# Altium PCB 3V3_LDO.PcbDoc
Units mm, origin at the board's own origin, x right, y up, seen from the top; angles counter-clockwise.
Board outline 20.6 x 11.6 mm, 2 copper layers (Top Layer, Bottom Layer); 11 components, 6 nets, 25 pads, 21 vias.
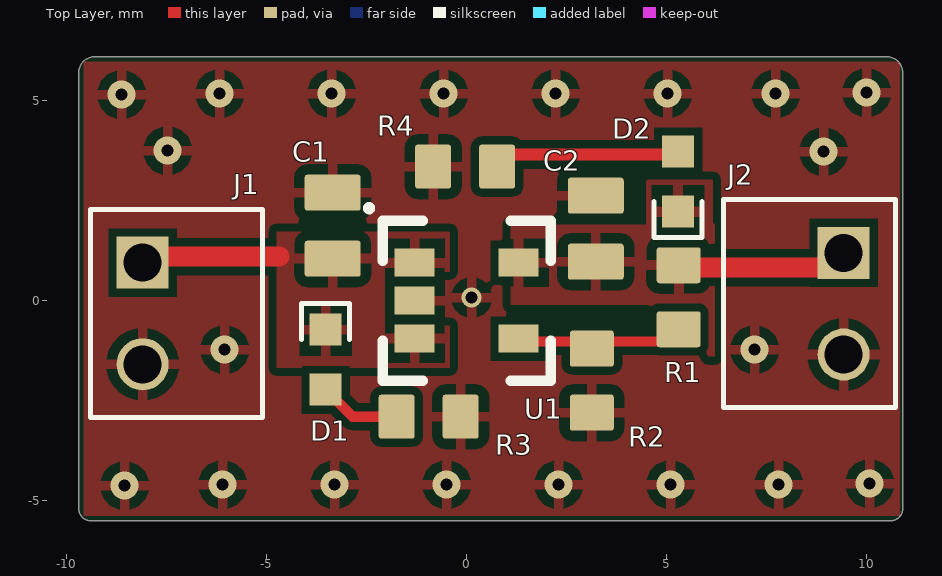
[diagram p0: Top Layer view]
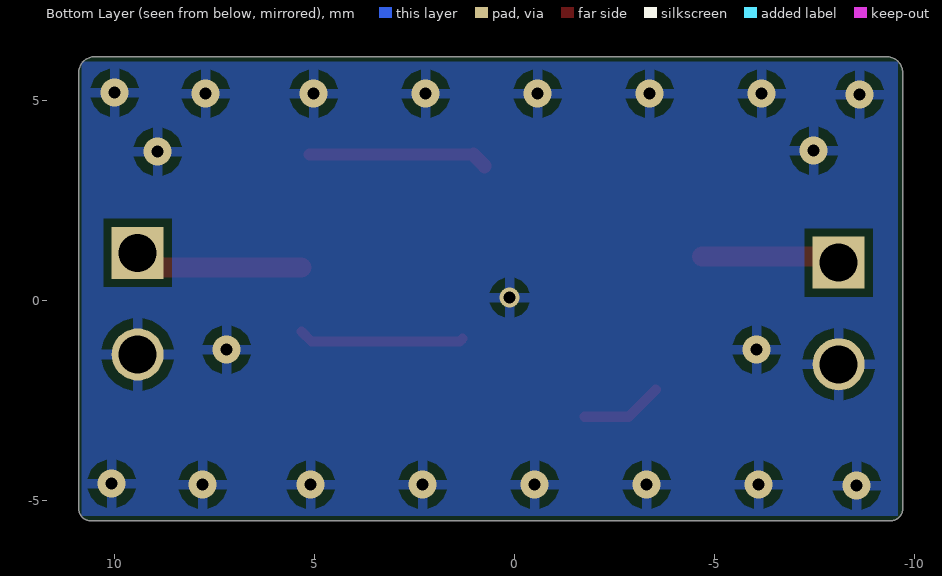
[diagram p1: Bottom Layer view, seen from below]
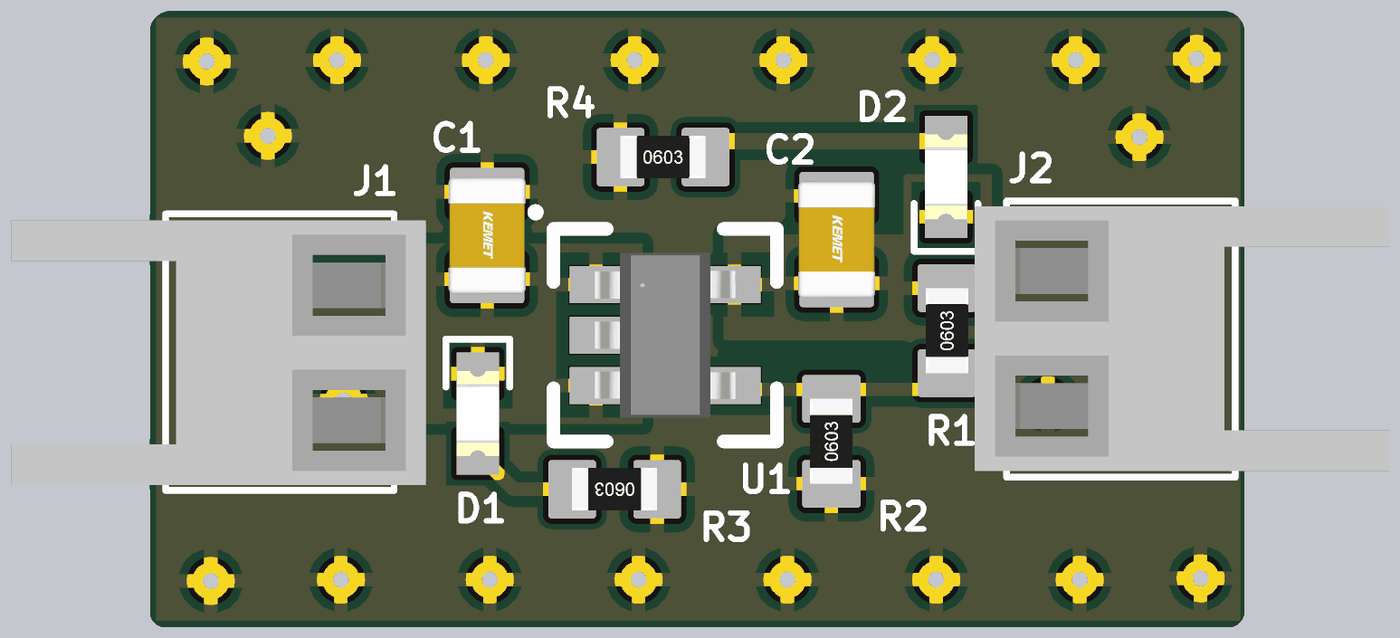
[diagram p2: 3D render of the assembled board from above, using the file's embedded part models]

## Layer stack, top to bottom
Top Solder: solder mask 0.0102, Solder Resist, Dk 3.5
Top Layer: signal copper 0.0356
Dielectric 1: dielectric 0.32, FR-4, Dk 4.8
Bottom Layer: signal copper 0.0356
Bottom Solder: solder mask 0.0102, Solder Resist, Dk 3.5

## Board outline
-9.4,-5.5 cw(c-9.4,-5.2) -9.7,-5.2 -9.7,5.7 cw(c-9.3,5.7) -9.3,6.1 10.5,6.1 cw(c10.5,5.7) 10.9,5.7 10.9,-5.2 cw(c10.6,-5.2) 10.6,-5.5

## Design rules (kind name [scope] priority, off if disabled: settings)
Clearance [All] p1: gap=0.2 ignorepadtopadclearanceinfootprint=FALSE
PolygonConnect [All] p1: connectstyle=Relief reliefconductorwidth=0.254 reliefentries=4 polygonreliefangle="90 Angle" airgapwidth=0.254
RoutingVias [All] p1: holewidth=0.711 width=1.27 viastyle="Through Hole" minholewidth=0.3 minwidth=0.5 maxholewidth=6.3 maxwidth=1.27
SolderMaskExpansion [All] p1: expansion=0.102 istentingtop=FALSE
UnRoutedNet [All] p1: checkbadconnections=TRUE
Width [All] p1: maxlimit=0.5 minlimit=0.2 preferedwidth=0.254 minimp=50.000000 maximp=50.000000 favimp=50.000000
29 further rules are at their usual default settings.

## Components (designator, comment, footprint, x,y, rotation, side; value= is the part's Value field where it differs from the comment)
C1 "GRM188R61A105KA61D" CAP0805 -3.35,1.875 r270 top value=1μF
C2 "GRM188R71A225KE15D" CAP0805 3.227,1.8 r270 top value=2.2μF
D1 "LTST-C190KRKT" LED0603 -3.525,-1.475 r270 top
D2 "LTST-C190GKT" LED0603 5.284,2.978 r90 top
J1 "0022022025" 0022022025#1 -8.3,-0.32 r270 top
J2 "0022022025" 0022022025#2 9.625,-0.075 r90 top
R1 "RC0603FR-079K1L" RES0603 5.301,0.085 r90 top value=9.1kΩ
R2 "RC0603FR-0715KL" RES0603 3.128,-1.998 r90 top value=15.0kΩ
R3 "RC0402JR-07300RL" RES0603 -0.95,-2.9 r180 top value=300Ω
R4 "RC0402FR-07130RL" RES0603 -0.04,3.352 r0 top value=130Ω
U1 "AP2210K-3.3TRE1" AP2210K-3.3TRE1 0,0 r270 top

## Footprints (in the part's own frame and the unit in brackets; to place one, negate y for a bottom-side part, rotate by r counter-clockwise, add the part's x,y. Pads: shape width x height; smd on the part's side, far side on the other; paste and mask are expansions set on the pad)
0022022025#1 [mm] "CONN RCPT 2POS 0.1 TIN PCB"
  rect 1.3x1.3 hole 0.95: 1(-1.27,0.2)
  round 1.3 hole 0.95: 2(1.27,0.2)
  silkscreen extent -2.6,-1.1 2.6,3.2, body extent -2.48,-4 2.5,3.8, height 7.88
0022022025#2 [mm] "CONN RCPT 2POS 0.1 TIN PCB"
  rect 1.3x1.3 hole 0.95: 1(1.27,0.2)
  round 1.3 hole 0.95: 2(-1.27,0.2)
  silkscreen extent -2.6,-1.1 2.6,3.2, body extent -2.48,-4 2.5,3.8, height 7.88
AP2210K-3.3TRE1 [mm] "IC REG LINEAR 3.3V 300MA SOT23"
  rect 0.7x1 smd paste+0 mask+0.025: 1(-0.95,-1.3)
  rect 0.7x1 smd mask+0.025: 2(0,-1.3) 3(0.95,-1.3) 4(0.95,1.3) 5(-0.95,1.3)
  silkscreen extent -2.34,-2.46 2,2.1, body extent -1.55,-1.32 1.55,1.32, height 1.45
CAP0805 [mm] "Chip Capacitor, Body 2.0x1.2mm, Height 0.45mm, IPC Medium Density"
  rrect15% 0.9x1.4 smd: 1(-0.825,0) 2(0.825,0)
  body extent -1.1,-0.73 1.1,0.72, height 1.39
LED0603 [mm]
  rect 0.8x0.8 smd: 1(-0.75,0) 2(0.75,0)
  silkscreen extent -1.4,-0.6 -0.5,0.6, body extent -0.8,-0.4 0.8,0.4, height 0.8
RES0603 [mm] "Chip Resistor, Body 1.6x0.8mm, IPC Medium Density"
  rrect15% 0.9x1.1 smd: 1(-0.8,0) 2(0.8,0)
  body extent -0.8,-0.4 0.8,0.4, height 0.46

## Part data
C1: "CAP CER 1UF 10V X5R 0603", Manufacturer 1=Murata, Supplier Part Number 1=490-1543-2-ND, Voltage Rating=10V, Manufacturer Part Number 1=GRM188R61A105KA61D, Supplier 1=Digi-Key
C2: "CAP CER 2.2UF 10V X7R 0603", Manufacturer 1=Murata, Supplier Part Number 1=490-4520-2-ND, Voltage Rating=10V, Manufacturer Part Number 1=GRM188R71A225KE15D, Supplier 1=Digi-Key
D1: "LED RED CLEAR CHIP SMD 0603", Manufacturer Part Number 1=160-1436-2-ND, Manufacturer 1=LTST-C190KRKT, Supplier 1=Digikey, Supplier Part Number 1=160-1436-2-ND
D2: "LED GREEN CLEAR CHIP SMD 0603", Manufacturer Part Number 1=160-1436-2-ND, Supplier Part Number 1=160-1183-1-ND, Manufacturer 1=LTST-C190GKT, Supplier 1=Digikey
J1 J2: "2 Position Receptacle Connector 0.100\" (2.54mm) Through Hole Tin", Manufacturer 1=MOLEX, Supplier Part Number 1=WM3200-ND, Manufacturer Part Number 1=0022022025, Supplier 1=DigiKey
R1: "RES 9.1K OHM 1% 1/10W 0603", Manufacturer 1=YAGEO, Power Rating=1/10W, Supplier Part Number=311-9.10KHRTR-ND, Manufacturer Part Number 1=RC0603FR-079K1L, Supplier 1=Digi-Key
R2: "RES 15K OHM 1% 1/10W 0603", Manufacturer=YAGEO, Manufacturer 1="Stackpole Electronics Inc", Manufacturer Part Number 1=RNCP0603FTD10K0, Rating=1/10W, Supplier Part Number=311-9.10KHRTR-ND, Supplier Part Number 1=RNCP0603FTD10K0CT-ND, Supplier=DigiKey, Supplier 1=Digi-Key
R3: "RES 300 OHM 5% 1/16W 0402", Manufacturer 1=YAGEO, Power Rating=1/16W, Supplier Part Number=311-300JRTR-ND, Manufacturer Part Number 1=RC0402JR-07300RL, Supplier 1=Digi-Key
R4: "RES 130 OHM 1% 1/16W 0402", Manufacturer 1=YAGEO, Power Rating=1/16W, Supplier Part Number=311-130LRTR-ND, Manufacturer Part Number 1=RC0402FR-07130RL, Supplier 1=Digi-Key
U1: "IC REG LINEAR 3.3V 300MA SOT23-5", Manufacture 1="Diodes Incorporated", Supplier Part Number 1=31-AP2210K-3.3TRE1CT-ND, Manufacture Part Number 1=AP2210K-3.3TRE1, Supplier 1=DigiKey

## Via types
v1: diameter 0.7, hole 0.3, Top Layer to Bottom Layer, 20 vias
v2: diameter 0.5, hole 0.3, Top Layer to Bottom Layer, 1 vias

## Nets (pads, with @x,y where several pads share a name; then routed paths per layer and width w, separated by ;. In a path a pad name is that pad's centre, name@x,y a point inside that pad or via, vN(x,y) a via of type N, cw(c..) or ccw(c..) an arc to the next point about the centre after c; other vN are vias at no path point)
+3.3V: C2.2 D2.1 J2.1 R1.2 U1.5 | length 4
  Top Layer w0.5: R1.2@5.325,0.825 8.855,0.825 J2.1@9.2,1.17
+5V: C1.2 D1.1 J1.1 U1.1 U1.3 | length 3.5
  Top Layer w0.5: J1.1 -7.95,1.1 -4.678,1.1
ADJ: R1.1 R2.2 U1.4 | length 4.2
  Top Layer w0.25: U1.4 1.37,-1.02 3.073,-1.02 5.08,-1.02 R1.1@5.325,-0.775
GND: C1.1 C2.1 J1.2 J2.2 R2.1 R3.1 R4.1 U1.2
  other v1: -8.55,-4.625 -6.1,-4.6 -3.3,-4.6 -0.5,-4.6 2.3,-4.6 5.1,-4.6 7.8,-4.6 10.075,-4.575 -6.05,-1.225 7.2,-1.225 8.925,3.725 -7.475,3.75 -8.625,5.15 -6.175,5.175 -3.375,5.175 -0.575,5.175 2.225,5.175 5.025,5.175 7.725,5.175 10,5.2
  other v2: 0.125,0.075
LED1: D1.2 R3.2 | length 2.1
  Top Layer w0.254: D1.2 -2.85,-2.9 R3.2
LED2: D2.2 R4.2 | length 4.5
  Top Layer w0.3: R4.2@1.035,3.65 D2.2@5.125,3.65
  Top Layer w0.35: R4.2 0.76,3.375 R4.2@1.035,3.65

## Polygon pours and split planes (outlines as drawn)
GND on Top Layer "GND_L01_P014" (solid, remove dead copper, pour order 14): -9.575,5.975 10.825,5.975 10.825,-5.375 -9.575,-5.375
+3.3V on Top Layer "+3.3V_L01_P012" (solid, pour order 12): 6.2,1.9 6.15,1.95 6.15,3.025 4.525,3.025 4.486,2.986 4.486,1.9 1.1,1.9 1.1,-0.1 4.5,-0.1 4.5,-0.7 5.195,-1.395 6.2,-1.395
+5V on Top Layer "+5V_L01_P013" (solid, pour order 13): -0.425,-1.675 -0.425,-0.625 -2.05,-0.625 -2.05,0.725 -0.425,0.725 -0.425,1.725 -4.75,1.725 -4.75,0.125 -4.75,-1.675
GND on Bottom Layer "GND_L02_P005" (solid, pour order 5): -9.575,5.975 10.825,5.975 10.825,-5.375 -9.575,-5.375

## Silkscreen, mask and mechanical layers (free items; w line width, h text height)
Mechanical 1:
  the board outline again, w0.275